# Altium PCB INH v4.01.PcbDoc
Units mm, origin at the board's own origin, x right, y up, seen from the top; angles counter-clockwise.
Board outline 76.96 x 46.23 mm, 2 copper layers (Top Layer, Bottom Layer), stack 1.671 mm thick; 25 components, 8 nets, 51 pads, 4 vias.
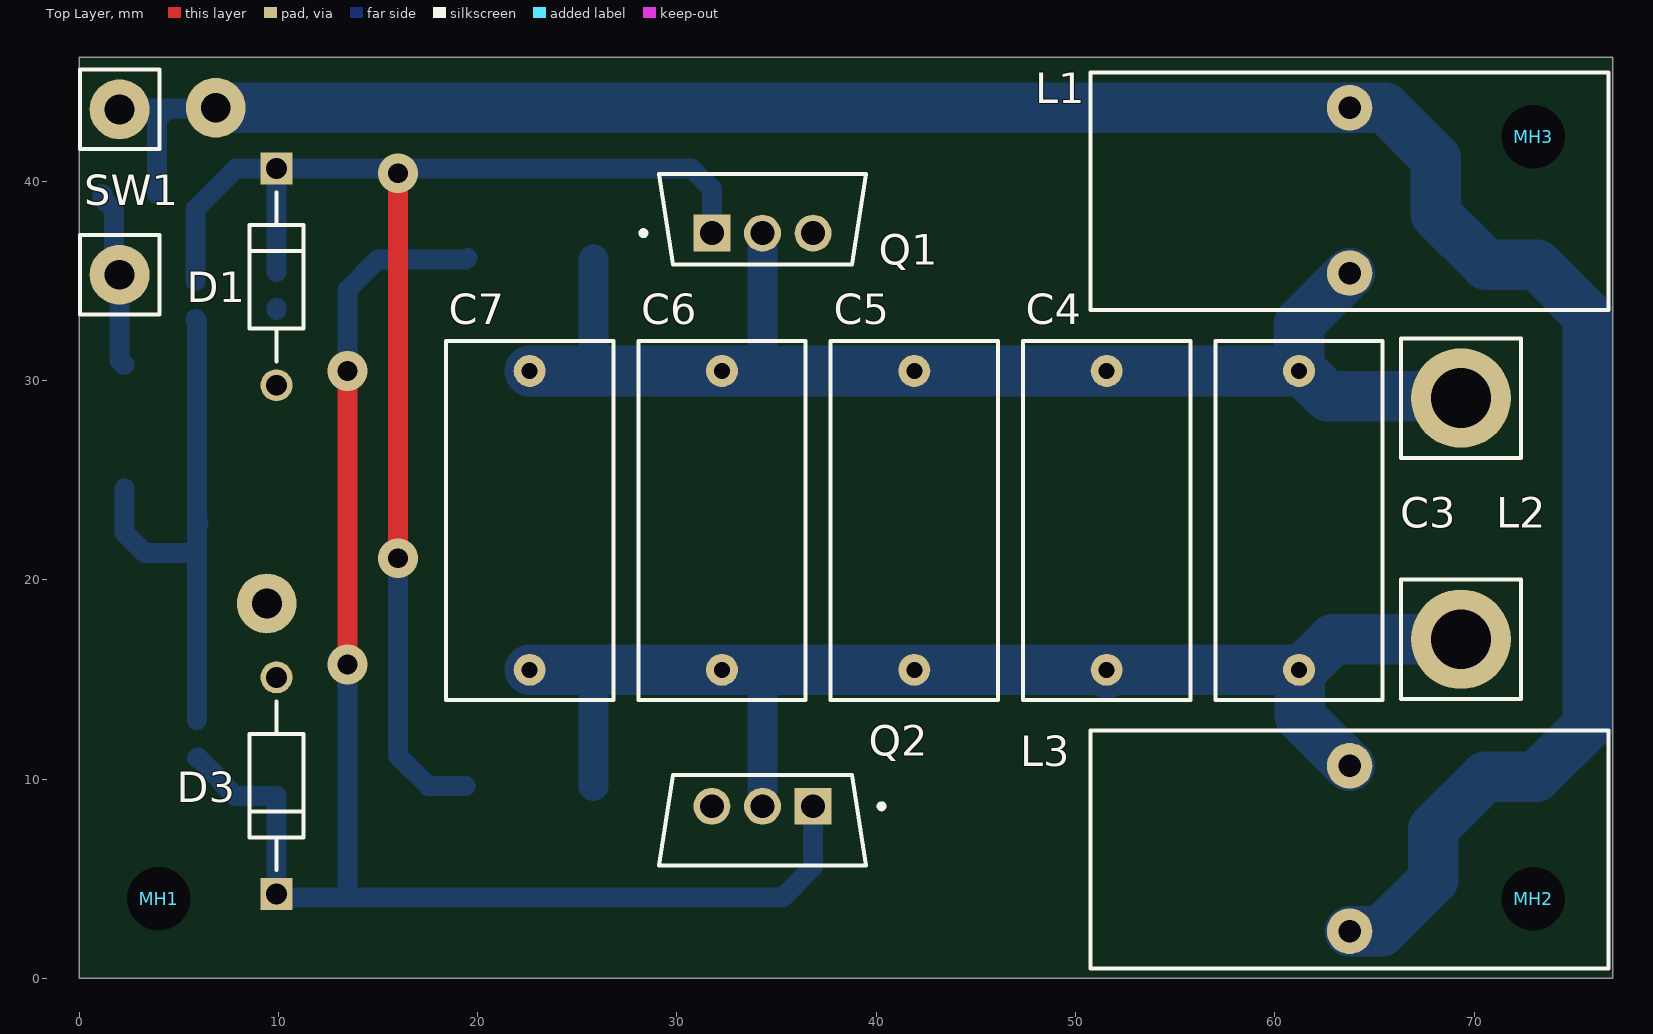
[diagram p0: Top Layer view]
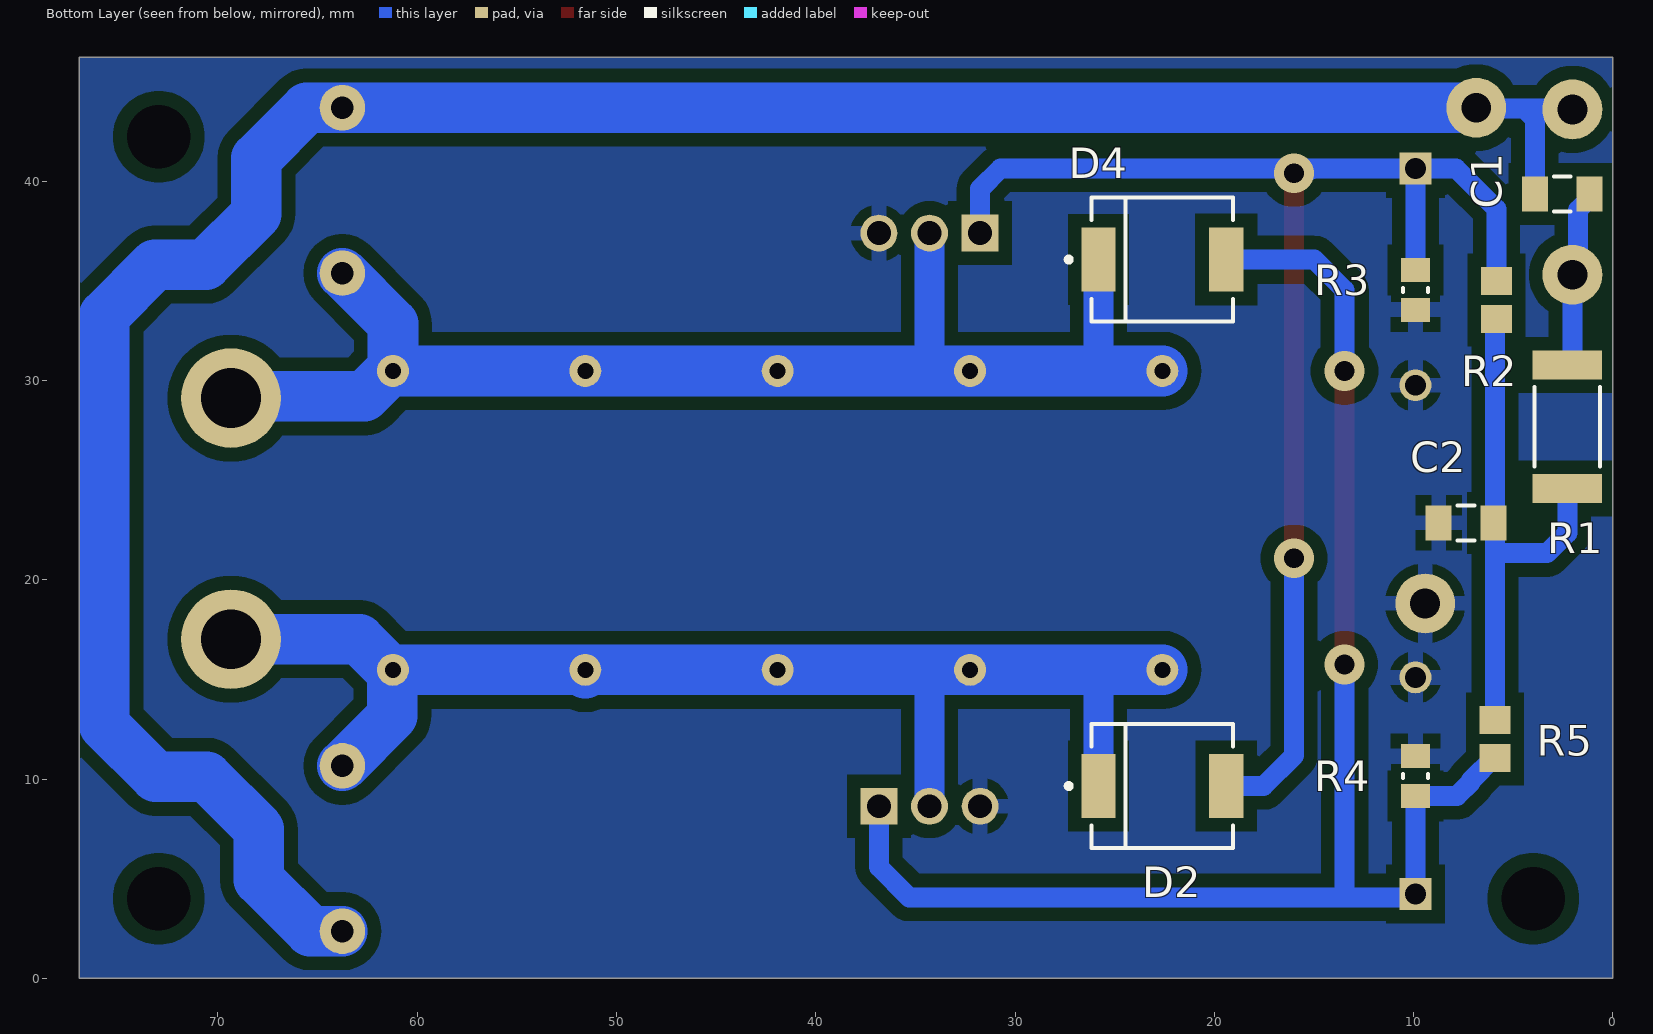
[diagram p1: Bottom Layer view, seen from below]
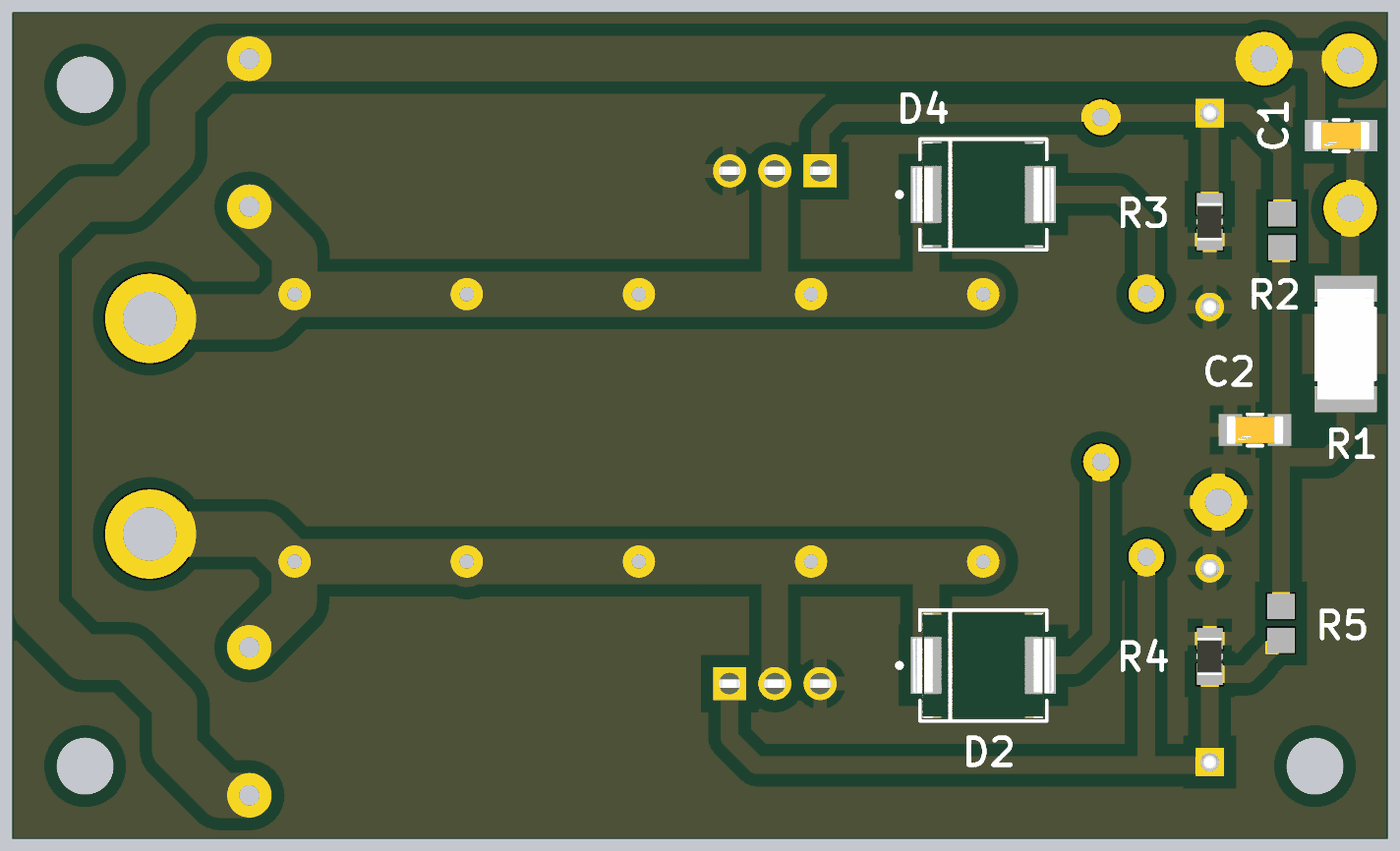
[diagram p2: 3D render of the assembled board from below, using the file's embedded part models]

## Layer stack, top to bottom
Top Solder: solder mask 0.0102, Solder Resist, Dk 3.5
Top Layer: signal copper 0.0356
Dielectric 1: dielectric 1.6, FR-4, Dk 4.8
Bottom Layer: signal copper 0.0356
Bottom Solder: solder mask 0.0102, Solder Resist, Dk 3.5

## Board outline
0,46.228 76.962,46.228 76.962,0 0,0

## Design rules (kind name [scope] priority, off if disabled: settings)
Clearance [All] p1: gap=0.69 ignorepadtopadclearanceinfootprint=FALSE except(0.4: SMDPad-SMDPad; 0.762: Arc-Arc Arc-Track Track-Track)
Height [All] p1: minheight=0 maxheight=50.8 prefheight=12.7
HoleSize [All] p1: absolutevalues=TRUE maxlimit=5.08 minlimit=0.025 maxpercent=80.000 minpercent=20.000
PolygonConnect [All] p1: connectstyle=Relief reliefconductorwidth=0.762 reliefentries=4 polygonreliefangle="90 Angle" airgapwidth=0.508
RoomDefinition "INH v4.01" [InComponentClass('INH v4.01')] p1: confinementstyle=ConfineIn formatcopy=TRUE lockcomponents=FALSE outline -0.254,-7.366 76.962,-7.366 76.962,53.34 -0.254,53.34
RoutingCorners [All] p1: cornerstyle=45-Degree minsetback=1 maxsetback=1
RoutingVias [All] p1: holewidth=1.5 width=3 viastyle="Through Hole" minholewidth=0.5 minwidth=1 maxholewidth=1 maxwidth=2
SilkToSolderMaskClearance [IsPad] p1: minsilkscreentomaskgap=0.1 clearancetoexposedcopper=TRUE
SolderMaskExpansion [All] p1: expansion=0.102 istentingtop=FALSE
Width [All] p1: maxlimit=3 minlimit=0.5 preferedwidth=1
26 further rules are at their usual default settings.

## Components (designator, comment, footprint, x,y, rotation, side; value= is the part's Value field where it differs from the comment)
C1 "100nF" "1206 CAPACITOR" 2.54,39.37 r0 bottom
C2 "1uF" "1206 CAPACITOR" 7.366,22.86 r0 bottom
C3 "470nF" "THT CAPACITOR P15MM (84X183MM)" 61.214,30.48 r270 top
C4 "470nF" "THT CAPACITOR P15MM (84X183MM)" 51.562,30.48 r270 top
C5 "470nF" "THT CAPACITOR P15MM (84X183MM)" 41.91,30.48 r270 top
C6 "470nF" "THT CAPACITOR P15MM (84X183MM)" 32.258,30.48 r270 top
C7 "470nF" "THT CAPACITOR P15MM (84X183MM)" 22.606,30.48 r270 top
D1 "12V" DO-41 9.906,35.202 r270 top
D2 "SS34" DO-214 22.606,9.652 r180 bottom
D3 "12V" DO-41 9.906,9.664 r90 top
D4 "SS34" DO-214 22.606,36.068 r180 bottom
L1 "50uH" "L 50UH" 63.754,43.688 r270 top
L2 "5uH" "L Main" 69.342,29.118 r270 top
L3 "50uH" "L 50UH" 63.754,10.668 r270 top
MH1 "Mounting Hole m3" "Mounting Hole m3"#1 3.81,4.064 r0 top
MH2 "Mounting Hole m3" "Mounting Hole m3"#2 72.898,4.064 r0 top
MH3 "Mounting Hole m3" "Mounting Hole m3"#3 73.152,42.418 r0 top
Q1 "IRLB3036PBF" FP-PG-TO220-3-MFG 34.29,38.1 r90 top
Q2 "IRLB3036PBF" FP-PG-TO220-3-MFG 34.29,7.931 r270 top
R1 "22R" FP-CRCW2512-e3-MFG 2.286,27.686 r90 bottom
R2 "120R" RESC2013X60X40ML20T25 5.842,34.036 r90 bottom
R3 "10k" RESC2013X60X35ML10T20 9.906,34.544 r90 bottom
R4 "10k" RESC2013X60X35ML10T20 9.906,10.16 r90 bottom
R5 "120R" RESC2013X60X40ML20T25 5.916,12.012 r270 bottom
SW1 "SW On/Off" "SW ON/OFF" 2.032,35.306 r90 top

## Footprints (in the part's own frame and the unit in brackets; to place one, negate y for a bottom-side part, rotate by r counter-clockwise, add the part's x,y. Pads: shape width x height; smd on the part's side, far side on the other; paste and mask are expansions set on the pad)
"1206 CAPACITOR" [mm]
  rect 1.305x1.758 smd paste+0 mask+0: 1(-1.376,0) 2(1.376,0)
  silkscreen extent -0.42,-0.88 0.42,0.88, body extent -1.6,-0.8 1.6,0.8, height 1.4
DO-41 [mm]
  rect 1.6x1.6 hole 1.05 paste-2539.97 mask+0: 1(-5.438,0)
  round 1.6 hole 1.05 paste-2539.97 mask+0: 2(5.438,0)
  silkscreen extent -4.24,-1.36 4.24,1.36, body extent -6.34,-1.46 6.34,1.46, height 0.25
DO-214 [mm]
  rect 1.72x3.2 smd paste+0 mask+0: 1(-3.205,0) 2(3.205,0)
  silkscreen extent -4.83,-3.11 3.55,3.11, body extent -3.97,-2.95 3.97,2.95, height 2.62
FP-CRCW2512-e3-MFG [mm]
  rect 1.45x3.5 smd paste+0 mask+0: 1(-3.1,0) 2(3.1,0)
  silkscreen extent -2,-1.65 2,1.65, body extent -3.15,-1.58 3.15,1.58, height 0.7
FP-PG-TO220-3-MFG [mm]
  rect 1.85x1.85 hole 1.2 paste-2539.97 mask+0: 1(-0.705,2.54)
  round 1.85 hole 1.2 paste-2539.97 mask+0: 2(-0.705,0) 3(-0.705,-2.54)
  silkscreen extent -2.27,-5.2 2.27,6.1, body extent -5,-15 15,15, height 35
"L 50UH" [mil]
  round 90 hole 45: 1(0,0) 2(326.77,0)
  silkscreen extent -70,-512 400,512, body extent -69,-513 404,510, height 1024
"L Main" [mm]
  round 5 hole 3: 1(0,0) 2(12.1,0)
  silkscreen extent -3,-3 15.1,3
"Mounting Hole m3"#1 [mm]
  round 0 hole 3.2 unplated: ""(0.19,-0.064)
"Mounting Hole m3"#2 [mm]
  round 0 hole 3.2 unplated: ""(0.064,-0.064)
"Mounting Hole m3"#3 [mm]
  round 0 hole 3.2 unplated: ""(-0.19,-0.19)
RESC2013X60X35ML10T20 [mm] "Chip Resistor, 2-Leads, Body 2.1x1.35mm, IPC Low Density"
  rect 1.2x1.45 smd: 1(-1,0) 2(1,0)
  silkscreen extent -0.1,-0.63 0.1,0.63, body extent -1.05,-0.68 1.05,0.67, height 0.6
RESC2013X60X40ML20T25 [mm] "Chip Resistor, 2-Leads, Body 2.00x1.25mm, IPC Low Density"
  rect 1.4x1.55 smd: 1(-0.95,0) 2(0.95,0)
  body extent -1.1,-0.72 1.1,0.72, height 0.6
"SW ON/OFF" [mm]
  round 3 hole 1.5: 1(0,0) 2(8.3,0)
  silkscreen extent -2,-2 10.3,2
"THT CAPACITOR P15MM (84X183MM)" [mm]
  round 1.6 hole 0.8: 1(0,0) 2(15,0)
  silkscreen extent -1.5,-4.2 16.5,4.2, body extent -1.5,-4.25 16.5,4.25, height 18.3

## Part data
C1: library part "C 1206 100nF"
C2: library part "C 1206 1uF", "Cap Ceramic 1uF 25V X7R ±20% SMD 1206 +125°C Embossed T/R", Case Code (Imperial)=1206, Case Code (Metric)=3216, Dielectric=X7R, Max Operating Temperature=125°C, Min Operating Temperature=-55°C, Package Quantity=1, Tolerance=20%, Voltage Rating=25V, Capacitance=1uF, Case/Package=1206, Contact Plating=Tin, Depth=1.6mm, Height=1.6mm, Lead Free="Lead Free", Length=3.2mm, Mount="Surface Mount", Packaging="Tape and Reel", Radiation Hardening=No, Thickness=0.071inch, Voltage Rating (DC)=25V, Width=0.063inch
C3 C4 C5 C6 C7: library part "C 084x183 P15 470nF", "PP X2 Capacitor 470nF 275V"
D1 D3: library part "DZ DO-41 12v", "BZX85C10-T50R Zener Diode, 12V V(Z), 2%, 1W, Silicon, Unidirectional, DO-41", Manufacturer Lifecycle Status=ACTIVE, Max Operating Temperature=200°C, Max Power Dissipation=1W, Max Reverse Leakage Current=500nA, Min Operating Temperature=-65°C, Test Current=25mA, Tolerance=5%, Contact Plating=Tin, Element Configuration=Single, ESD Protection=No, Impedance=7Ω, Lead Free="Lead Free", Lifecycle Status=Production, Mount="Through Hole", NexarPartId=84793728, Number of Pins=2, Packaging="Tape & Reel", Power Dissipation=1W, Power Rating=1W, RoHS=Compliant, Voltage Rating (DC)=12V, Voltage Tolerance=5%, Weight=245mg, Zener Current=25mA, Zener Voltage=12V
D2 D4: library part "D DO-214 Schottky", "DIODE SCHOTTKY 40V 3A DO214AB", Forward Current=3A, Manufacturer=Vishay, Manufacturer Part Number=SS34-E3/57T, Max Junction Temp=+150°C, Max Repetitive Reverse Voltage=40V, Max Surge Forward Current=100A, Package=95402, Peak Reverse Current=0.5mA, Temperature="-55°C to +150°C", Temperature Range Low=-55°C, Automotive=No, Category=Diode, ComponentLink2Description=Datasheet, ComponentLink2URL=http://www.vishay.com/docs/88751/ss32.pdf, Device Class L1="Discrete Semiconductors", Device Class L2=Diodes, Device Class L3="Schottky Diodes", Digikey Description="DIODE SCHOTTKY 40V 3A DO214AB", Footprint Url=http://www.vishay.com/docs/95402/smc.pdf, Height=2.62mm, Lead Free=Yes, Mouser Description="Schottky Diodes & Rectifiers 3.0 Amp 40 Volt", Octopart=https://octopart.com/ss34-e3%2F57t-vishay-39552907, RoHS=TRUE, Standoff Height=0mm, Temperature Range High=+150°C
L1 L3: library part "L 50uH"
L2: library part "L Main"
Q1 Q2: library part "Q TO-220 IRLB3036PBF", "MOSFET N-CH 60V 195A TO220AB", Case/Package=TO-220AB, Continuous Drain Current (ID)=195A, Drain to Source Breakdown Voltage=60V, Drain to Source Resistance=1.9mΩ, Gate to Source Voltage (Vgs)=16V, Input Capacitance=11.21nF, Max Junction Temperature (Tj)=175°C, Max Power Dissipation=380W, Min Operating Temperature=-55°C, On-State Resistance=2.4mΩ, Package Quantity=1000, Resistance=2.4MΩ, Threshold Voltage=2.5V, Drain to Source Voltage (Vdss)=60V, Element Configuration=Single, Height=9.02mm, Lead Free="Lead Free", Lifecycle Status=Production, Max Operating Temperature=175°C, Mount="Through Hole", NexarPartId=65874922, Number of Channels=1, Number of Elements=1, Number of Pins=3, Power Dissipation=380W, Rds On Max=2.4mΩ, REACH SVHC="No SVHC", Rise Time=220ns, RoHS=Compliant, Schedule B=8541290080|8541290080|8541290080|8541290080|8541290080|8541290080|8541290080|8541290080|8541290080|8541290080|8541290080|8541290080|8541290080|8541290080|8541290080|8541290080|8541290080|8541290080|8541290080|8541290080|8541290080|8541290080|8541290080|85, Turn-Off Delay Time=110ns, Turn-On Delay Time=66ns
R1: library part CMP-02407-005306-1, "RES Thick Film, 22Ω, 5%, 1W, 200ppm/°C, 2512", Case Code (Imperial)=2512, Case Code (Metric)=6432, Max Operating Temperature=155°C, Max Power Dissipation=1W, Min Operating Temperature=-55°C, Package Quantity=1, Temperature Coefficient=200ppm/°C, Tolerance=5%, Voltage Rating=500V, Case/Package=2512, Composition="Thick Film", Contact Plating=Tin, Depth=3.15mm, Features="Automotive AEC-Q200", Height=0.6mm, Lead Free="Lead Free", Length=6.3mm, Military Standard=Not, Mount="Surface Mount", Number of Terminations=2, Packaging="Tape and Reel", Power Rating=1W, Radiation Hardening=No, Resistance=22R, Termination=Solder, Voltage Rating (DC)=500V, Weight=0.001429oz, Width=0.124inch
R2 R5: library part CMP-2001-00588-1, Manufacturer=Panasonic, Part Number=ERA6AEB121V
R3 R4: library part CMP-1659-00013-4, "Chip Resistor, 10 KOhm, +/- 1%, 0.125 W, -55 to 155 degC, 0805 (2012 Metric), RoHS, Tape and Reel", Manufacturer=Yageo, Max Operating Temperature="155 degC", Min Operating Temperature="-55 degC", Package Quantity=5000, Voltage Rating="150 V", ComponentLink1Description="Manufacturer URL", ComponentLink1URL=http://www.yageo.com/, ComponentLink2Description=Datasheet, ComponentLink2URL=http://www.yageo.com/documents/recent/PYu-RC_Group_51_RoHS_L_04.pdf, DatasheetVersion="Rev. 4, 02/2016", Height="0.5 mm", Length="2 mm", Mount="Surface Mount", Mounting Technology="Surface Mount", PackageDescription="2-Pin Surface Mounted Device, Body 2 x 1.25 mm", PackageReference=0805, Packaging="Tape and Reel", Pins=2, REACH SVHC="No SVHC", RoHSCompliant=true
SW1: "Push Button Switch", Case\/Package=SMD/SMT, Contact Current Rating=50mA, Contact Resistance=100mOhm, Manufacturer="TE Connectivity", Max Operating Temperature=85degC, Max Voltage Rating (DC)=12V, Min Operating Temperature=-35degC, Operating Force=180gf, Package Description="2-Pin Surface Mount Device, Body 6 x 3.5 mm, Pitch 9.19 mm", Package Quantity=1800, Package Reference=FSMSMTR, Voltage Rating (DC)=24V, Actuator Length=1.07mm, Actuator Material=Polyamide, Contact Material=Brass, Contact Plating=Silver, Current Rating=50mA, Datasheet URL=http://www.te.com/commerce/DocumentDelivery/DDEController?Action=showdoc&DocId=Customer+Drawing%7F1437566-3%7FC2%7Fpdf%7FEnglish%7FENG_CD_1437566-3_C2_1437566_3_1_c.dwg.pdf%7F1437566-4, Datasheet Version="Rev. C2, 08/2014", Electrical Life=20000Cycles, ELV=Compliant, Illumination Type=Illuminated, Lead Free=LeadFree, Manufacturer URL=http://www.te.com/, Mechanical Life=20000Cycles, Mount=SurfaceMount, Mounting Technology=SurfaceMount, Orientation=Straight, Packaging=TapeandReel, REACH SVHC=Unknown, RoHSCompliant=true, Switch Travel=0.25mm, Termination=GullWing, Throw Configuration=SPST

## Free pads (board coordinates)
  round 3 hole 1.5: 3(6.858,43.688) 4(9.419,18.817)

## Via types
v1: diameter 2, hole 1, Top Layer to Bottom Layer, 4 vias

## Nets (pads, with @x,y where several pads share a name; then routed paths per layer and width w, separated by ;. In a path a pad name is that pad's centre, name@x,y a point inside that pad or via, vN(x,y) a via of type N, cw(c..) or ccw(c..) an arc to the next point about the centre after c; other vN are vias at no path point)
GND: C2.2 D1.2 D3.2 pad.4 Q1.3 Q2.3 R3.1 R4.2 | length 0.3
  Bottom Layer w1: D1.2@9.906,29.602 D1.2 ; R3.1 R3.1@9.906,33.644
NetC1_1: C1.1 R1.2 SW1.1 | length 9.1
  Bottom Layer w1: C1.1 1.164,39.144 1.748,38.56 1.748,35.59 SW1.1 2.032,31.011 2.257,30.786 R1.2
NetC2_1: C2.1 R1.1 R2.1 R5.1 | length 26.5
  Bottom Layer w1: R1.1 2.286,22.352 3.302,21.336 5.916,21.336 ; R2.1 5.916,33.012 C2.1@5.916,22.86 ; R5.1 5.916,21.336 ; C2.1 C2.1@5.916,22.86 ; 5.916,21.336 C2.1@5.916,22.86
NetC3_1: C3.1 C4.1 C5.1 C6.1 C7.1 D4.1 L1.2 L2.1 Q1.2 | length 65.8
  Bottom Layer w1.5: 25.654,30.48 25.811,30.637 D4.1 ; 34.29,30.48 Q1.2
  Bottom Layer w2.54: C7.1 25.654,30.48 C6.1 34.29,30.48 C5.1 C4.1 C3.1 ; L1.2 61.214,32.848 C3.1 ; L2.1 69.25,29.21 62.646,29.21 61.376,30.48 C3.1
NetC3_2: C3.2 C4.2 C5.2 C6.2 C7.2 D2.1 L2.2 L3.1 Q2.2 | length 66.1
  Bottom Layer w1.5: D2.1 25.811,15.323 ; Q2.2 34.29,15.48
  Bottom Layer w2.54: C7.2 25.654,15.48 ; 25.811,15.323 25.654,15.48 ; C4.2@51.562,15.318 C4.2 ; L3.1 61.242,13.18 61.242,15.452 C3.2 ; L2.2 62.914,17.018 61.376,15.48 C3.2 ; 25.654,15.48 C6.2 34.29,15.48 C5.2 C4.2 ; C4.2 C3.2
NetD1_1: D1.1 D2.2 Q1.1 R2.2 R3.2 | length 78.8
  Top Layer w1: v1(16.002,21.082) v1(16.002,40.402)
  Bottom Layer w1: R2.2 5.842,38.608 7.874,40.64 9.02,40.64 ; R3.2@9.906,35.444 R3.2 D1.1@9.906,40.132 ; D1.1@10.206,40.432 D1.1@9.906,40.132 ; v1@15.057,40.64 15.104,40.593 15.811,40.593 v1(16.002,40.402) 16.273,40.402 16.511,40.64 30.734,40.64 31.75,39.624 Q1.1 ; v1(16.002,21.082) 16.002,11.176 17.526,9.652 D2.2 ; 22.677,40.64 D1.1 D1.1@9.906,40.132
NetD3_1: D3.1 D4.2 Q2.1 R4.1 R5.2 | length 77.7
  Top Layer w1: v1(13.462,15.748) v1(13.462,30.48)
  Bottom Layer w1: R5.2 5.991,11.062 7.111,9.942 7.111,9.867 7.818,9.16 R4.1 D3.1 D3.1@9.744,4.064 ; D3.1@9.906,4.064 13.462,4.064 ; v1(13.462,15.748) 13.462,4.064 ; v1(13.462,30.48) 13.462,34.544 14.986,36.068 D4.2 D4.2@19.479,36.146 ; Q2.1 36.83,5.588 35.306,4.064 13.462,4.064
VCC: C1.2 L1.1 L3.2 pad.3 SW1.2 | length 122.4
  Bottom Layer w1: SW1.2 2.073,43.647 4.445,43.647 ; C1.2 3.916,43.118 4.445,43.647 ; pad.3 6.817,43.647 4.445,43.647
  Bottom Layer w2.54: pad.3 65.532,43.688 68.072,41.148 68.072,38.354 70.612,35.814 73.152,35.814 75.692,33.274 75.692,12.7 73.109,10.117 70.569,10.117 67.943,7.491 67.943,4.951 65.36,2.368 L3.2
pads on no net: MH1. MH2. MH3.

## Polygon pours and split planes (outlines as drawn)
GND on Bottom Layer "GND_L02_P000" (solid, pour order 0): 0,46.228 76.962,46.228 76.962,0 0,0

## Silkscreen, mask and mechanical layers (free items; w line width, h text height)
Top Overlay:
Board:
  the board outline again, w0.15